# Altium PCB PCB2.PcbDoc (part 1 of 2)
Units mil, origin at the board's own origin, x right, y up, seen from the top; angles counter-clockwise.
Board outline 3629.25 x 3621.67 mil, 2 copper layers (Top Layer, Bottom Layer); 84 components, 57 nets, 320 pads, 58 vias.
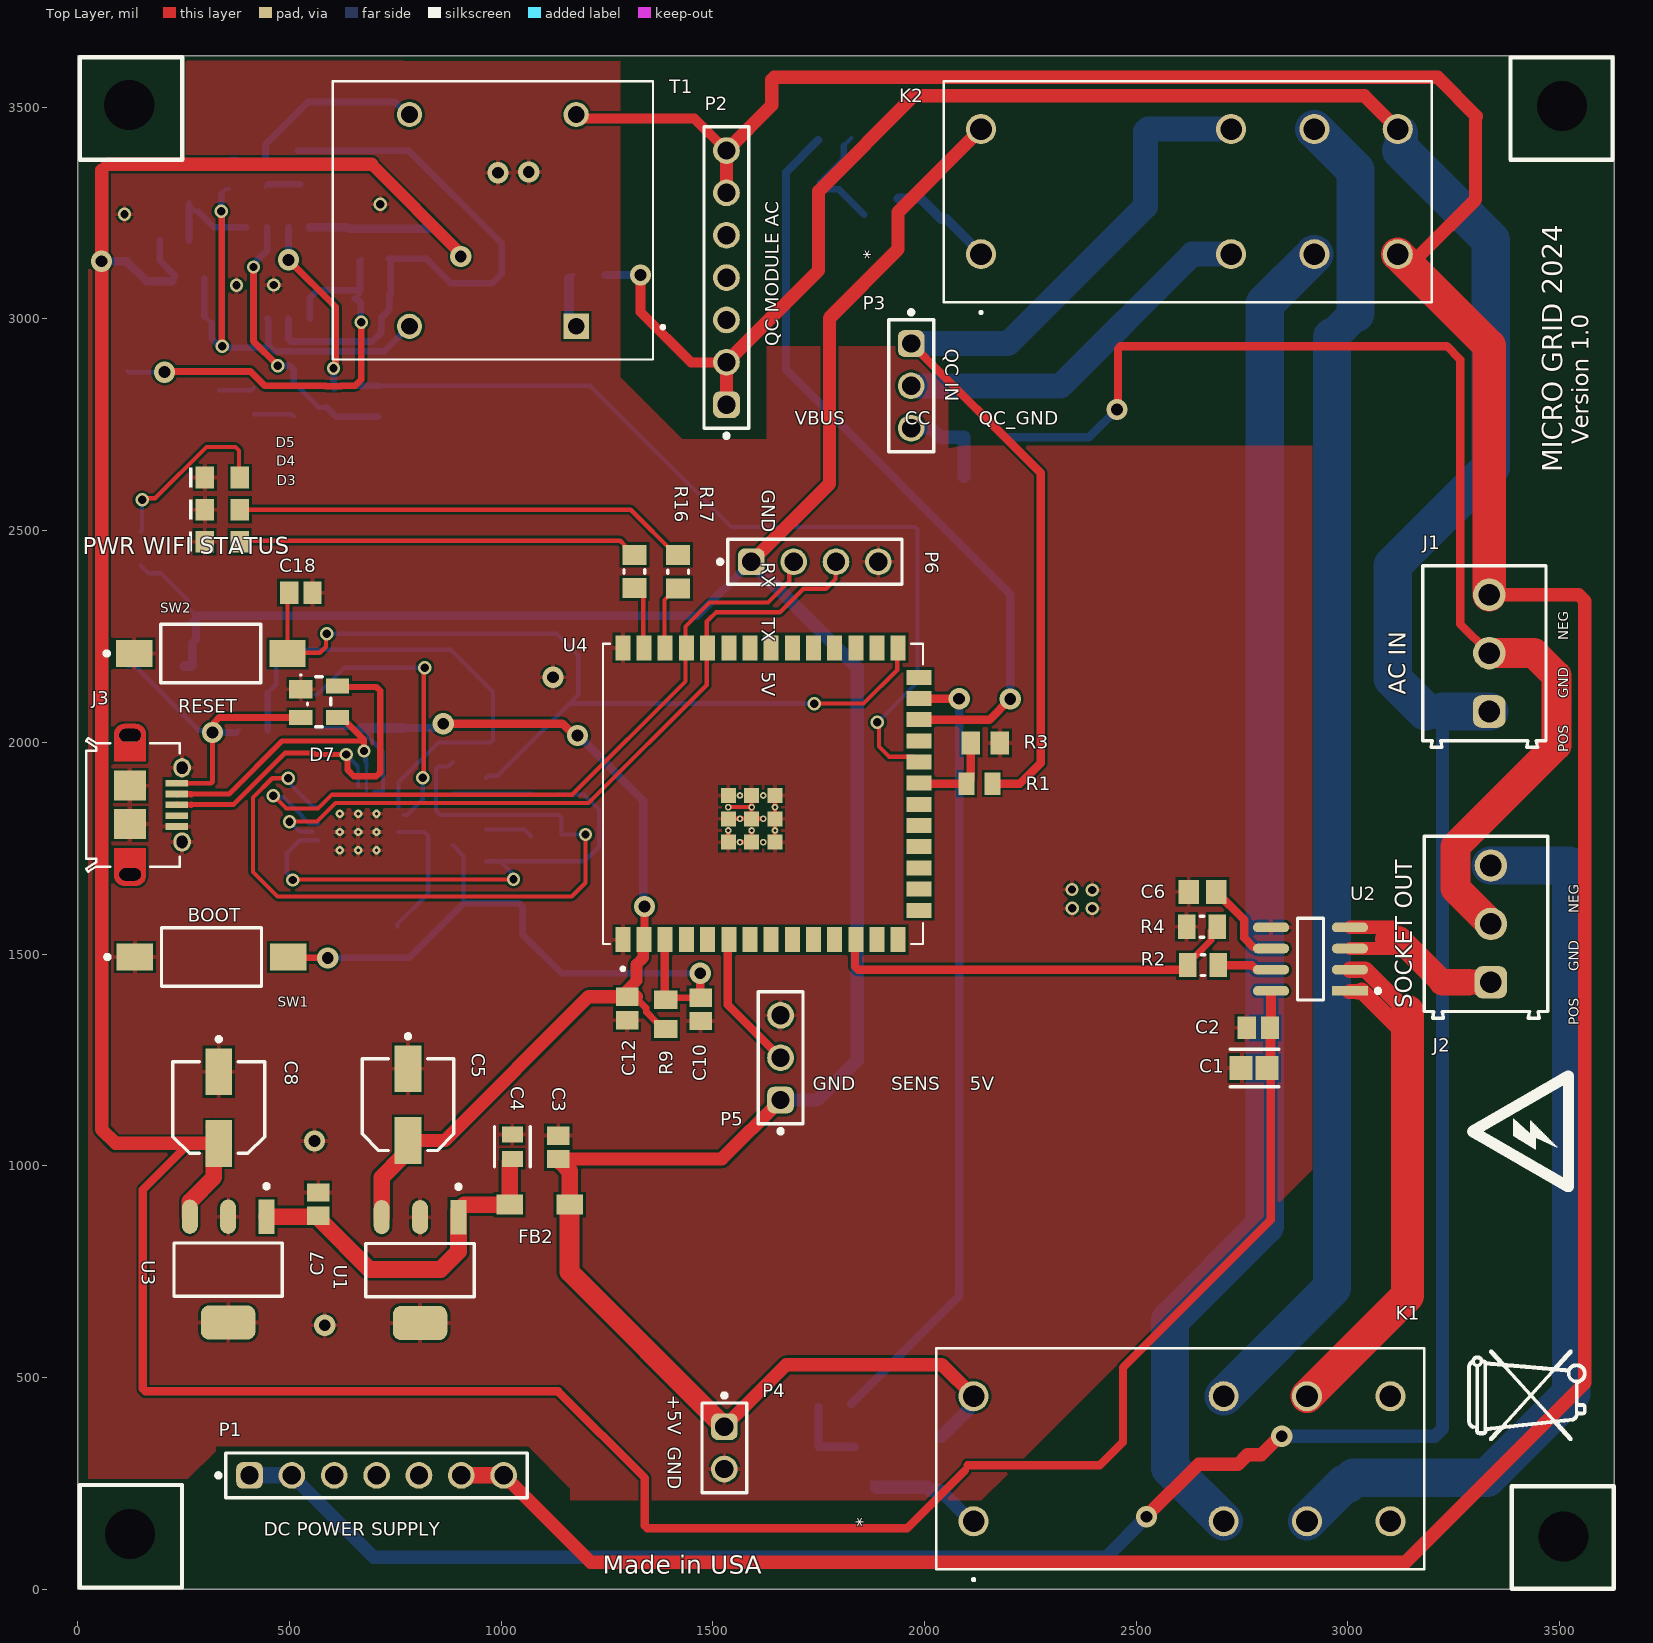
[diagram p0: Top Layer view]
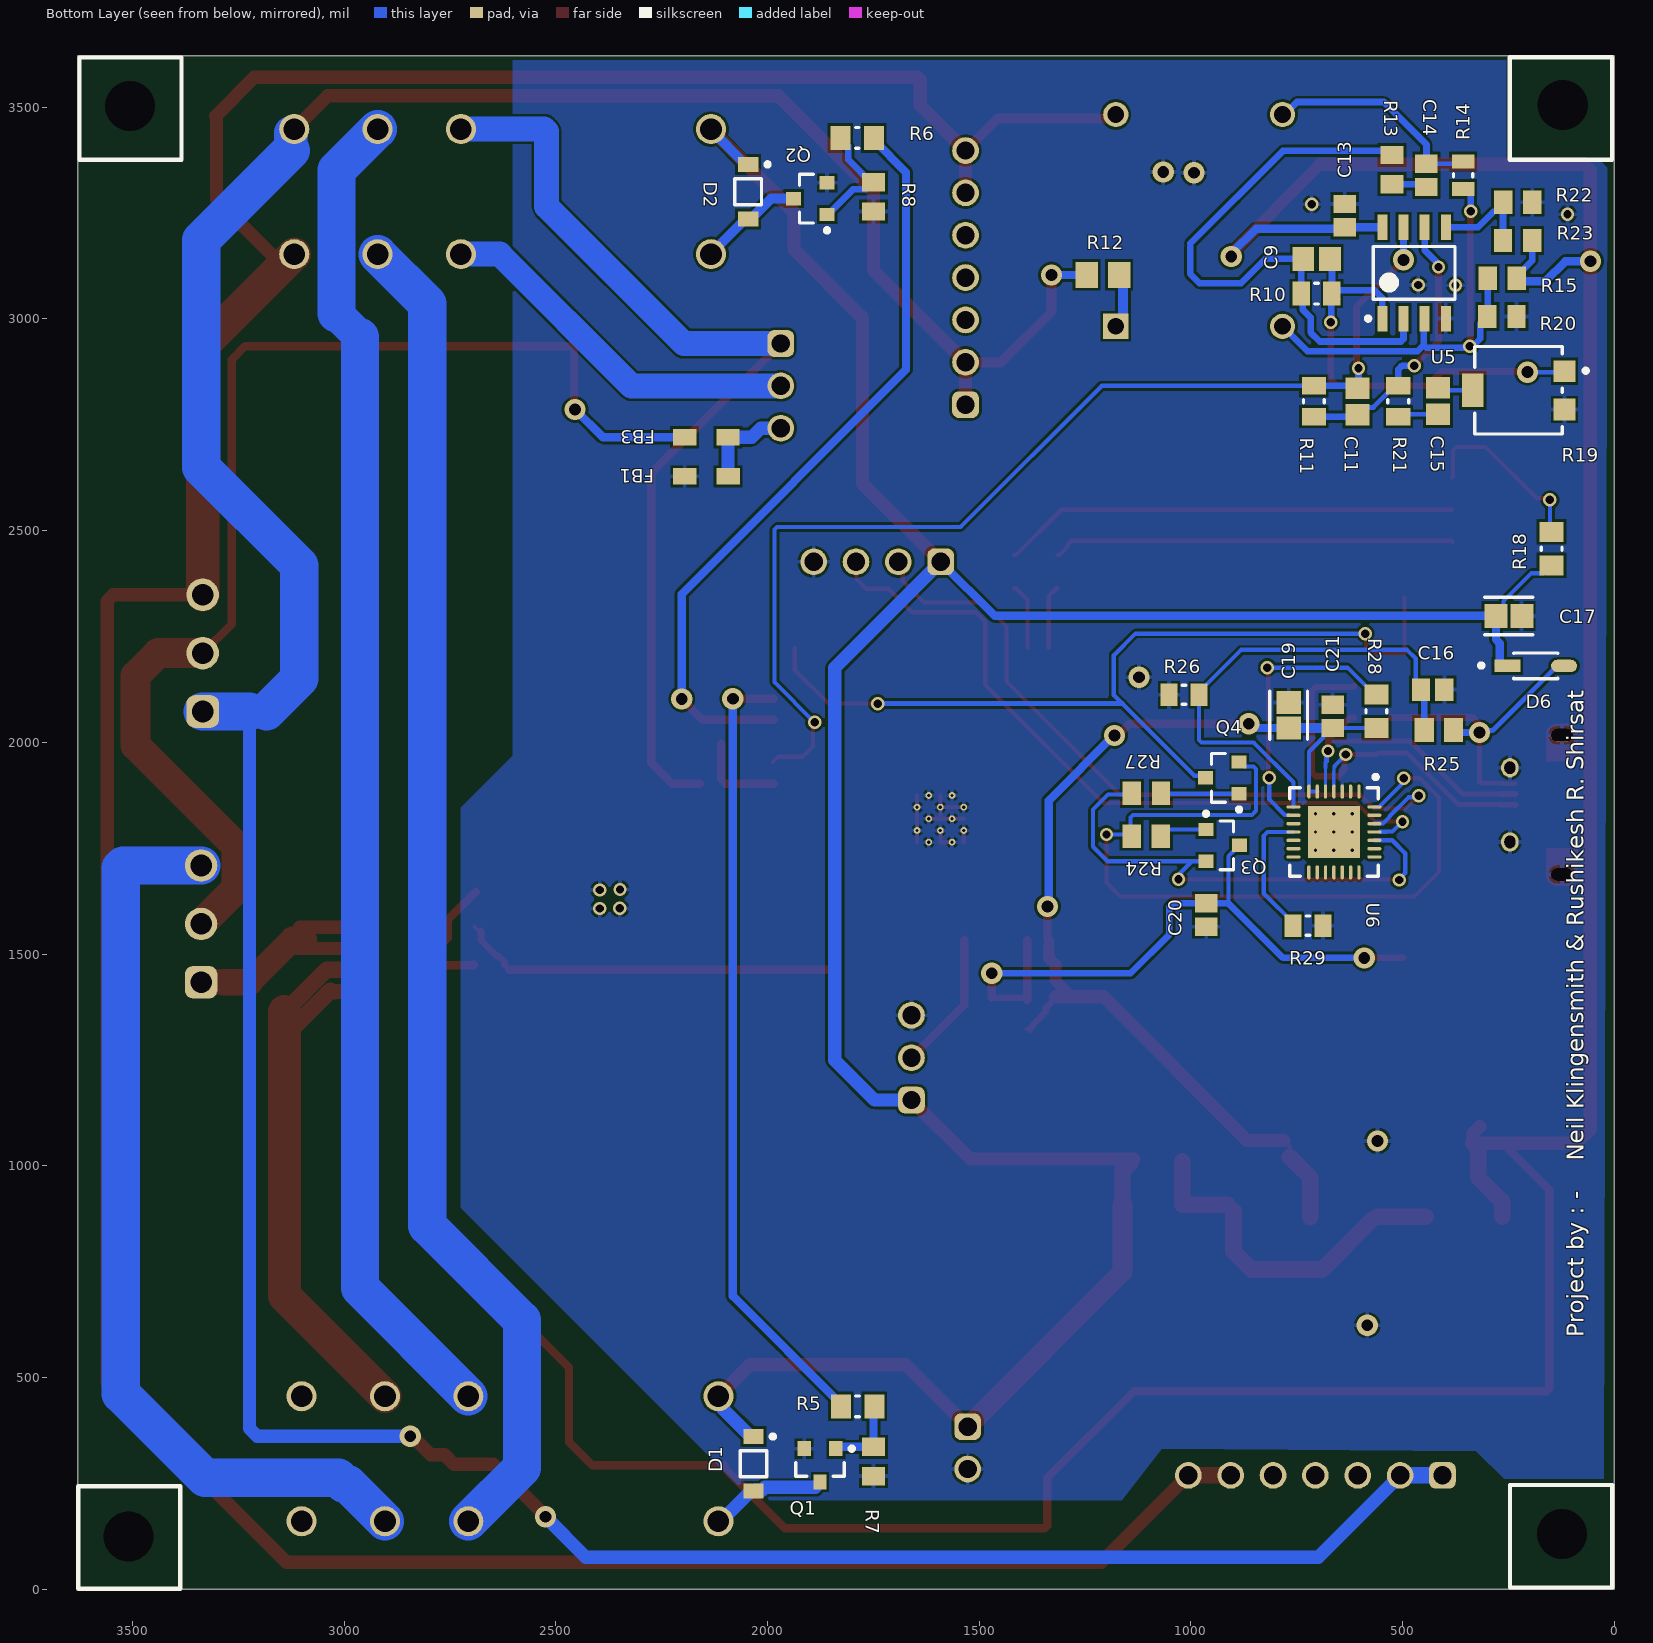
[diagram p1: Bottom Layer view, seen from below]
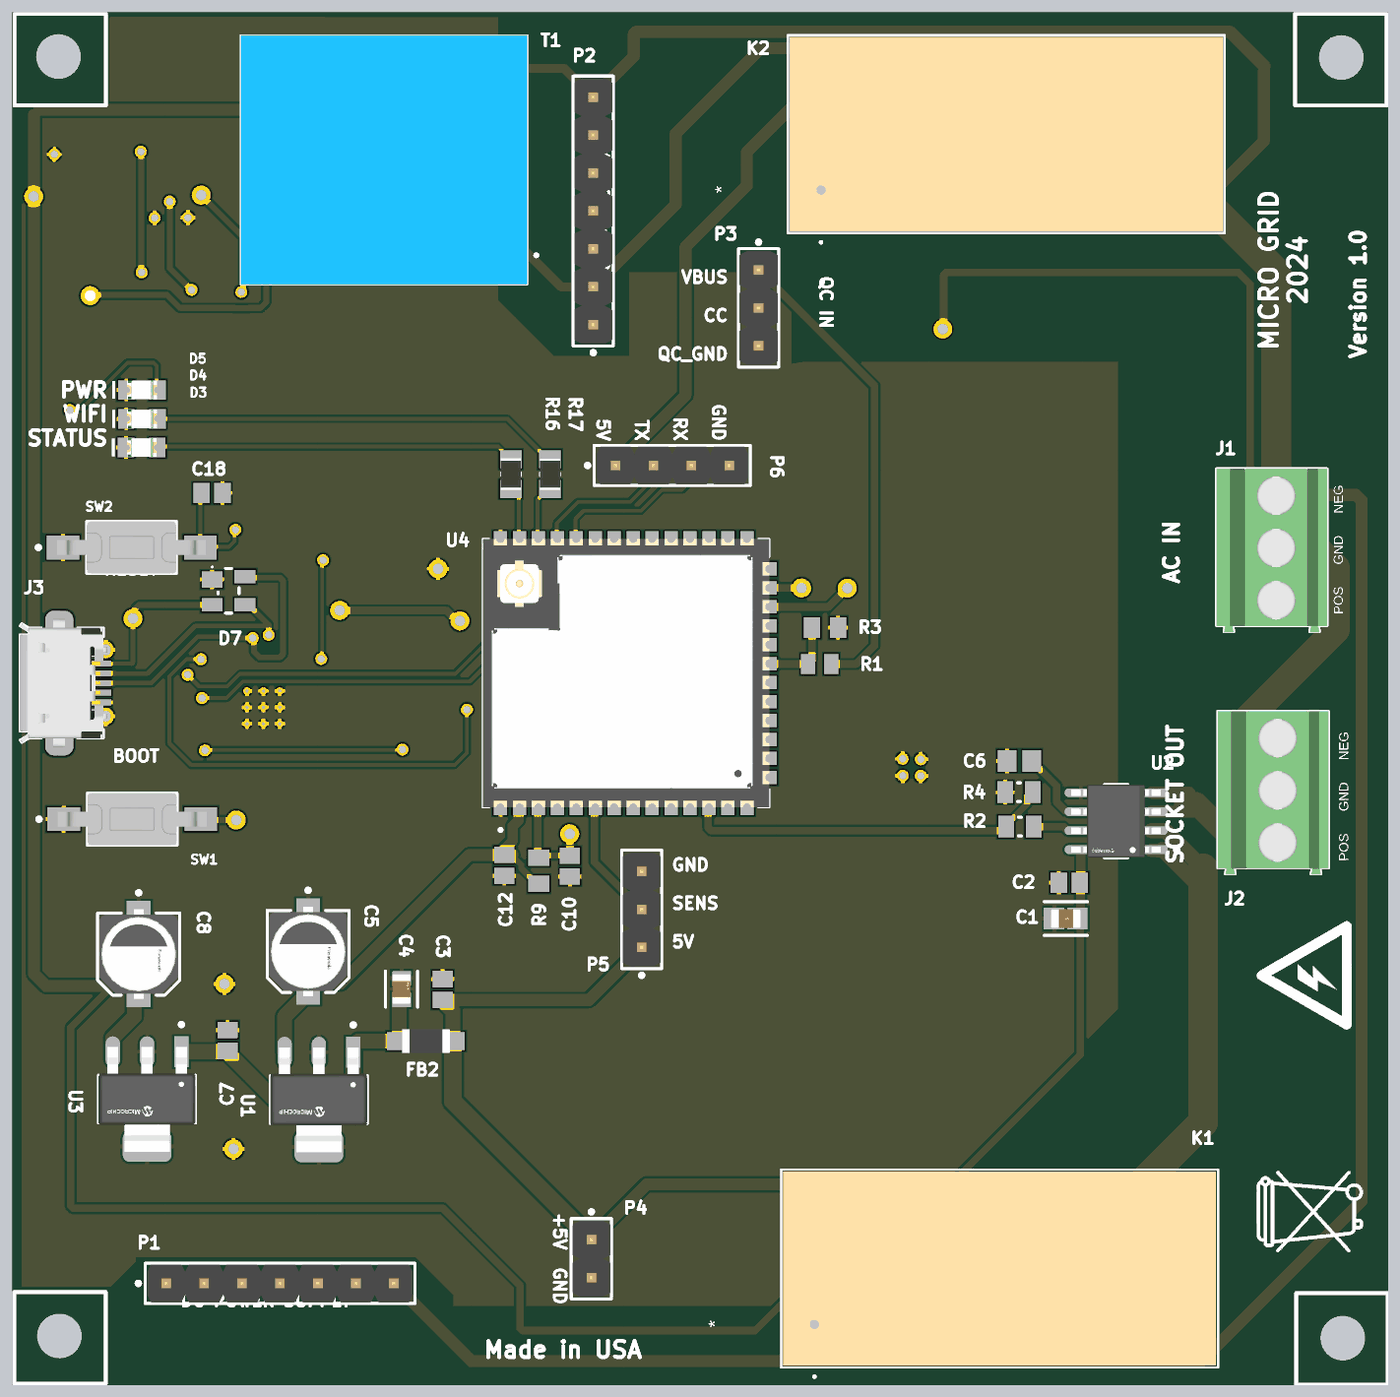
[diagram p3: 3D render of the assembled board from above, using the file's embedded part models]

## Layer stack, top to bottom
Top Solder: solder mask 0.4, Solder Resist, Dk 3.5
Top Layer: signal copper 1.4
Dielectric 1: dielectric 12.6, FR-4, Dk 4.8
Bottom Layer: signal copper 1.4
Bottom Solder: solder mask 0.4, Solder Resist, Dk 3.5

## Board outline
0,0 3629.25,0 3629.25,3621.67 0,3621.67

## Design rules (kind name [scope] priority, off if disabled: settings)
Clearance [All] p1: gap=6 ignorepadtopadclearanceinfootprint=FALSE
DiffPairsRouting [All] p1: maxlimit=10 minlimit=10 mostfreqgap=10 toplayer_minwidth=15 toplayer_maxwidth=15 toplayer_prefwidth=15 bottomlayer_minwidth=15 bottomlayer_maxwidth=15 bottomlayer_prefwidth=15 maxuncoupledlength=500
Height [All] p1 off: minheight=0 maxheight=1000 prefheight=500
HoleSize [All] p1: absolutevalues=TRUE maxlimit=200 minlimit=1 maxpercent=80.000 minpercent=20.000
MinimumSolderMaskSliver [All] p1 off: minsoldermaskwidth=10
PolygonConnect [All] p1: connectstyle=Relief reliefconductorwidth=10 reliefentries=4 polygonreliefangle="90 Angle" airgapwidth=6
RoutingVias [All] p1: holewidth=28 width=50 viastyle="Through Hole" minholewidth=28 minwidth=50 maxholewidth=28 maxwidth=50
SilkToSolderMaskClearance [IsPad] p1 off: minsilkscreentomaskgap=10 clearancetoexposedcopper=TRUE
SolderMaskExpansion [All] p1: expansion=4 istentingtop=FALSE
SupplyNets "Schematic Supply Nets_6" [InNet('GND')] p1: voltage=0.000
SupplyNets "Schematic Supply Nets_5" [InNet('+3V3B')] p2: voltage=0.000
SupplyNets "Schematic Supply Nets_4" [InNet('+5V')] p3: voltage=0.000
SupplyNets "Schematic Supply Nets_3" [InNet('+5V_B')] p4: voltage=0.000
SupplyNets "Schematic Supply Nets_1" [InNet('+3V3A')] p5: voltage=0.000
SupplyNets "Schematic Supply Nets" [InNet('VBUS')] p6: voltage=0.000
Width [All] p1: maxlimit=100 minlimit=6 preferedwidth=10 minimp=50.000000 maximp=50.000000 favimp=50.000000
25 further rules are at their usual default settings.

## Classes and differential pairs
differential pair USB_D: +USB_D_P -USB_D_N

## Components (designator, comment, footprint, x,y, rotation, side; value= is the part's Value field where it differs from the comment)
C1 "10μF 25V" FP-C2012-125-0_2-IPC_B#1 2779,1230.94 r180 top
C2 "0.1uf 50v" CAPC2013X140X50LL20T25 2788.11,1325.72 r0 top
C3 "0.1uf 50v" CAPC2013X140X50LL20T25 1135.25,1043.68 r270 top
C4 "10uf 16v" FP-GRM21B-0_1-IPC_C 1026.77,1045.13 r90 top
C5 "100uf 10v" FP-SC-MFG 780.45,1144.16 r270 top
C6 "1nf 25v 5%" CAPC2013X145X50NL20T20 2656.46,1646.78 r180 top
C7 "0.1uf 50v" CAPC2013X140X50LL20T25 568.17,909.22 r270 top
C8 "100uf 10v" FP-SC-MFG 333.5,1137.46 r270 top
C9 "100p" CAPC2013X140X50NL20T25 703.06,3141.55 r180 bottom
C10 "1uf" CAPC2013X140X50LL20T25 1471.08,1369.37 r90 top
C11 "100p" CAPC2013X140X50NL20T25 606.98,2804.6 r90 bottom
C12 "0.1uf 50v" CAPC2013X140X50LL20T25 1297.75,1371.4 r90 top
C13 "0.1uf 50v" CAPC2013X140X50LL20T25 637.01,3243.62 r90 bottom
C14 "1uf" CAPC2013X140X50LL20T25 444.01,3338.68 r270 bottom
C15 "100p" CAPC2013X140X50NL20T25 416.47,2805.95 r270 bottom
C16 "1uf" CAPC2013X140X50LL20T25 429.18,2124.59 r180 bottom
C17 "10μF 25V" FP-C2012-125-0_2-IPC_B#2 249.84,2298.43 r180 bottom
C18 "0.1uf 50v" CAPC2013X140X50LL20T25 527.17,2353.4 r0 top
C19 "10μF 25V" FP-C2012-125-0_2-IPC_B#3 769.44,2063.93 r90 bottom
C20 "0.1uf 50v" CAPC2013X140X50LL20T25 964.24,1592.07 r270 bottom
C21 "0.1uf 50v" CAPC2013X140X50LL20T25 665.58,2061.16 r270 bottom
D1 "SMMSD914T1G" ONSC-SOD-123-2-425-04_V 2033.18,296.18 r270 bottom
D2 "SMMSD914T1G" ONSC-SOD-123-2-425-04_V 2045.62,3300.2 r270 bottom
D3 "150080RS75000" WL-SMCW_0805_150080xx75000 341.51,2473.66 r0 top
D4 "150080BS75000" WL-SMCW_0805_150080xx75000 342.1,2549.16 r0 top
D5 "150080RS75000" WL-SMCW_0805_150080xx75000 342.1,2625.25 r0 top
D6 "1N5819HW-7-F" FP-SOD123-IPC_A 186.07,2180.36 r180 bottom
D7 "SP0503BAHTG" LFUS-SOT143-4_V 570.56,2095.8 r0 top
FB1 "742792022" WE-CBF_0805_L2W1.2H0.9_HC 2144.25,2627.88 r180 bottom
FB2 "74279218" WE-CBF_1206_L3.2W1.6H1.1_HC 1091.18,908.06 r180 top
FB3 "742792022" WE-CBF_0805_L2W1.2H0.9_HC 2144.31,2720.46 r180 bottom
J1 "AC IN" 691214110003 3321.92,2210.5 r90 top
J2 "OUTPUT TO SOCKET" 691214110003 3325.65,1571.18 r90 top
J3 "629105150921" 629105150921 124.11,1852.28 r270 top
K1 "AZ733-2CE-12DE" AZ733-2C_AMZ 2115.86,160.55 r90 top
K2 "AZ733-2CE-12DE" AZ733-2C_AMZ 2133.3,3152.56 r90 top
P1 "DC POWER SUPLY AC IN" 61300711121 706.2,268.87 r0 top
P2 "QC AC INPUT" 61300711121 1532.37,3097.3 r90 top
P3 "QC INPUT" 61300311121 1968.49,2841.67 r270 top
P4 "5V DC IN" 61300211121 1527.43,333.9 r270 top
P5 "HALL SENSOR A3144" 61300311121 1660.14,1255.13 r90 top
P6 "UART" 61300411121 1741.01,2426.17 r0 top
Q1 "MMBT2222ALT1G" ONSC-SOT-23-3-318-08_V 1875.92,292.6 r270 bottom
Q2 "MMBT2222ALT1G" ONSC-SOT-23-3-318-08_V 1898.69,3283.64 r0 bottom
Q3 "MMBT2222ALT1G" ONSC-SOT-23-3-318-08_V 925.14,1756.54 r180 bottom
Q4 "MMBT2222ALT1G" ONSC-SOT-23-3-318-08_V 925.79,1915.98 r0 bottom
R1 "147k 1%" RESC2013X70X40LL20T20 2129.69,1902.37 r180 top
R2 "10k 1%" RESC2013X50X30NL20T20 2657.47,1473.74 r180 top
R3 "10k 1%" RESC2013X60X40NL15T20 2143.57,1998.28 r0 top
R4 "10k 1%" RESC2013X50X30NL20T20 2655.18,1564.26 r0 top
R5 "1k 1%" RESC2013X60X35ML10T20 1787.27,431.94 r180 bottom
R6 "1k 1%" RESC2013X60X35ML10T20 1788.38,3426.97 r0 bottom
R7 "10k 1%" RESC2013X60X40NL15T20 1749.63,301.7 r90 bottom
R8 "10k 1%" RESC2013X60X40NL15T20 1749.87,3287.74 r90 bottom
R9 "10k 1%" RESC2013X60X40NL15T20 1388.68,1357.42 r90 top
R10 "100k 1%" RESC2013X60X30NL20T20 703.44,3059.38 r180 bottom
R11 "100k 1%" RESC2013X60X30NL20T20 709.83,2805.3 r90 bottom
R12 "820k 1%" RESC2013X70X40ML20T20 1208.31,3103.66 r180 bottom
R13 "10k 1%" RESC2013X60X40NL15T20 525.17,3352.45 r90 bottom
R14 "100r 1%" RESC2013X50X30LL20T20 357.5,3339.05 r90 bottom
R15 "10k 1%" RESC2013X60X40NL15T20 264.98,3095.35 r180 bottom
R16 "1k 1%" RESC2013X60X35ML10T20 1315.01,2403.13 r90 top
R17 "1k 1%" RESC2013X60X35ML10T20 1418.07,2403.07 r90 top
R18 "1k 1%" RESC2013X60X35ML10T20 148.5,2457.34 r90 bottom
R19 "100k" FP-TS53YL-MFG 226.39,2831.15 r90 bottom
R20 "10k 1%" RESC2013X60X40NL15T20 265.8,3005.49 r180 bottom
R21 "100k 1%" RESC2013X60X30NL20T20 510.61,2805.48 r90 bottom
R22 "10k 1%" RESC2013X60X40NL15T20 228.49,3275.22 r180 bottom
R23 "10k 1%" RESC2013X60X40NL15T20 228.69,3184.9 r180 bottom
R24 "10k 1%" RESC2013X60X40NL15T20 1105.52,1778.28 r0 bottom
R25 "22.1K 1%" RESC2013X70X40NL20T20 414.93,2029.07 r180 bottom
R26 "47K 1%" RESC2013X60X35NL10T20 1016.31,2112.14 r0 bottom
R27 "10k 1%" RESC2013X60X40NL15T20 1105.33,1879.34 r0 bottom
R28 "1k 1%" RESC2013X60X35ML10T20 562.02,2073.5 r270 bottom
R29 "10k 1%" RESC2013X60X35NL10T20 723.62,1567.08 r0 bottom
SW1 "RESET" TECO-FSMSM-2_V 316.36,1493.11 r0 top
SW2 "BOOT" TECO-FSMSM-2_V 314.81,2209.74 r0 top
T1 "ZMPT101B" XFMR_ZMPT101B 980.65,3232.28 r180 top
U1 "MIC5209-3.3YS" FP-SOT223-3LD-PL-1-IPC_A 808.87,753.66 r270 top
U2 "ACS725LLCTR-20AB-T" FP-LCN-8-IPC_B 2911.48,1487.96 r180 top
U3 "MIC5209-3.3YS" FP-SOT223-3LD-PL-1-IPC_A 355.72,754.76 r270 top
U4 "ESP32-S3-WROOM-1U-N16R8" XCVR_ESP32-S3-WROOM-1U-N16R8 1618.88,1878.37 r90 top
U5 "LM358ADR2G" ONSC-SOIC-8-751-07_V 473.22,3108.35 r90 bottom
U6 "CP2102-GM" SLAB-QFN-28-3125x3125TP_N 662.5,1788.21 r270 bottom

## Footprints (in the part's own frame and the unit in brackets; to place one, negate y for a bottom-side part, rotate by r counter-clockwise, add the part's x,y. Pads: shape width x height; smd on the part's side, far side on the other; paste and mask are expansions set on the pad)
61300211121 [mm] "Pin Header, pitch 2.54 mm, THT, Vertical, single row, 2p"
  rrect50% 1.6x1.6 hole 1.1: 1(-1.27,0)
  round 1.6 hole 1.1: 2(1.27,0)
  silkscreen extent -3.26,-1.34 2.69,1.34, body extent -2.54,-1.27 2.54,1.27, height 8.57
61300311121 [mm] "Pin Header, pitch 2.54 mm, THT, Vertical, single row, 3p"
  rrect50% 1.6x1.6 hole 1.1: 1(-2.54,0)
  round 1.6 hole 1.1: 2(0,0) 3(2.54,0)
  silkscreen extent -4.53,-1.34 3.96,1.35, body extent -3.81,-1.27 3.81,1.27, height 8.57
61300411121 [mm] "Pin Header, pitch 2.54 mm, THT, Vertical, single row, 4p"
  rrect50% 1.6x1.6 hole 1.1: 1(-3.81,0)
  round 1.6 hole 1.1: 2(-1.27,0) 3(1.27,0) 4(3.81,0)
  silkscreen extent -5.8,-1.35 5.23,1.34, body extent -5.08,-1.27 5.08,1.27, height 8.57
61300711121 [mm] "Pin Header, pitch 2.54 mm, THT, Vertical, single row, 7p"
  rrect50% 1.6x1.6 hole 1.1: 1(-7.62,0)
  round 1.6 hole 1.1: 2(-5.08,0) 3(-2.54,0) 4(0,0) 5(2.54,0) 6(5.08,0) 7(7.62,0)
  silkscreen extent -9.61,-1.34 9.04,1.34, body extent -8.89,-1.27 8.89,1.27, height 8.57
629105150921 [mm] "Micro USB 2.0 Type AB, Receptacle, Horizontal, SMT"
  rect 0.4x1.35 smd: 1(-1.3,2.8) 2(-0.65,2.8) 3(0,2.8) 4(0.65,2.8) 5(1.3,2.8)
  oval 0.75x1.3 hole 0.75 slot 1.3 at 90 deg: Shell(-4.175,0) Shell(4.175,0)
  oval 1.15x1.05 hole 0.65 slot 0.75 at 0 deg: Shell(-2.225,3.12) Shell(2.225,3.12)
  rect 1.8x1.9 smd: Shell(-1.15,0) Shell(1.15,0)
  Top Layer region: -4.25,-0.95 -4.48,-0.904 -4.674,-0.774 -4.804,-0.58 -4.85,-0.35 -4.85,-0.35 -4.85,0.35 -4.804,0.58 -4.674,0.774 -4.48,0.904 -4.25,0.95 -4.25,0.95 -2.6,0.95 -2.6,-0.95
  Top Layer pour cut-out: -4.25,-0.65 -4.365,-0.627 -4.462,-0.562 -4.527,-0.465 -4.55,-0.35 -4.55,-0.35 -4.55,0.35 -4.527,0.465 -4.462,0.562 -4.365,0.627 -4.25,0.65 -4.25,0.65 -4.1,0.65 -3.985,0.627 -3.888,0.562 -3.823,0.465 -3.8,0.35 -3.8,0.35 -3.8,-0.35 -3.823,-0.465 -3.888,-0.562 -3.985,-0.627 -4.1,-0.65 -4.1,-0.65
  Top Layer region: 4.25,-0.95 4.48,-0.904 4.674,-0.774 4.804,-0.58 4.85,-0.35 4.85,-0.35 4.85,0.35 4.804,0.58 4.674,0.774 4.48,0.904 4.25,0.95 4.25,0.95 2.6,0.95 2.6,-0.95
  silkscreen extent -4,-2.64 4,2.97, body extent -4.3,-2.64 4.3,3.23, height 2.76
691214110003 [mm] "3.50 mm Horizontal Entry Modular, 3p"
  rrect50% 1.95x1.95 hole 1.3: 1(-3.5,-0.3)
  round 1.95 hole 1.3: 2(0,-0.3) 3(3.5,-0.3)
  silkscreen extent -5.65,-3.7 5.25,3.7, body extent -5.7,-3.7 5.25,3.7, height 8.55
AZ733-2C_AMZ [mil]
  round 71 / inner round 60 / far side round 71 hole 51 paste-99999 mask+0: 1(0,0) 2(0,-590.55) 3(0,-787.4) 4(0,-984.25) 5(295.27,-984.25) 6(295.27,-787.4) 7(295.27,-590.55) 8(295.27,0)
  silkscreen extent -141,-1064 409,88, body extent -108,-1059 404,83, height 1035
CAPC2013X140X50LL20T25 [mm] "Chip Capacitor, 2-Leads, Body 2.00x1.25mm, IPC High Density"
  rect 1.1x1.35 smd: 1(-0.7,0) 2(0.7,0)
  body extent -1.1,-0.72 1.1,0.72, height 1.4
CAPC2013X140X50NL20T25 [mm] "Chip Capacitor, 2-Leads, Body 2.00x1.25mm, IPC Medium Density"
  rect 1.3x1.45 smd: 1(-0.8,0) 2(0.8,0)
  body extent -1.1,-0.72 1.1,0.72, height 1.4
CAPC2013X145X50NL20T20 [mm] "Chip Capacitor, 2-Leads, Body 2.00x1.25mm, IPC Medium Density"
  rect 1.25x1.45 smd: 1(-0.825,0) 2(0.825,0)
  body extent -1.1,-0.72 1.1,0.72, height 1.45
FP-C2012-125-0_2-IPC_B#1 [mil]
  rect 54.25x57.33 smd paste+0 mask+0: 1(-30.08,0) 2(32,0)
  silkscreen extent -57,-44 57,44, body extent -39,-25 39,25, height 57
FP-C2012-125-0_2-IPC_B#2 [mil]
  rect 54.25x57.33 smd paste+0 mask+0: 1(-30.08,0) 2(31.84,0)
  silkscreen extent -57,-44 57,44, body extent -39,-25 39,25, height 57
FP-C2012-125-0_2-IPC_B#3 [mil]
  rect 54.25x57.33 smd paste+0 mask+0: 1(-30.08,0) 2(30.08,0)
  silkscreen extent -57,-44 57,44, body extent -39,-25 39,25, height 57
FP-GRM21B-0_1-IPC_C [mil]
  rect 37.71x49.69 smd paste+0 mask+0: 1(-28.63,0) 2(28.63,0)
  silkscreen extent -47,-42 47,42, body extent -51,-31 51,31, height 10
FP-LCN-8-IPC_B [mil]
  rect 85.59x22.92 smd paste+0 mask+0: 1(-93.15,75)
  rrect100% 85.59x22.92 smd paste+0 mask+0: 2(-93.15,25) 3(-93.15,-25) 4(-93.15,-75) 5(93.15,-75) 6(93.15,-25) 7(93.15,25) 8(93.15,75)
  silkscreen extent -164,-96 31,96, body extent -118,-96 118,96, height 69
FP-SC-MFG [mm]
  rect 2.8x1.6 smd paste+0 mask+0: 1(-2.15,0) 2(2.15,0)
  silkscreen extent -4.22,-2.75 2.75,2.75, body extent -3.8,-3 3.8,3, height 0.25
FP-SOD123-IPC_A [mil]
  rect 61.32x29.23 smd paste+0 mask+0: 1(-66.94,0)
  rrect100% 61.32x29.23 smd paste+0 mask+0: 2(66.94,0)
  silkscreen extent -134,-31 52,31, body extent -72,-31 72,31, height 57
FP-SOT223-3LD-PL-1-IPC_A [mm]
  rect 2.054x0.962 smd paste+0 mask+0: 1(-3.175,2.3)
  rrect100% 2.054x0.962 smd paste+0 mask+0: 2(-3.175,0) 3(-3.175,-2.3)
  rrect47% 2.054x3.262 smd paste+0 mask+0: 4(3.175,0)
  silkscreen extent -5.12,-3.25 1.6,3.25, body extent -4.7,-3.75 4.7,3.75, height 0.25
FP-TS53YL-MFG [mm]
  rect 1.3x1.3 smd paste+0 mask+0: 1(1.15,-2.75) 3(-1.15,-2.75)
  rect 2x1.3 smd paste+0 mask+0: 2(0,2.75)
  silkscreen extent -2.62,-4.15 2.62,2.63, body extent -2.5,-3.25 2.5,3.25, height 2.6
LFUS-SOT143-4_V [mm] "SOT143, 4-Leads, Body 3.04x1.4mm, Pitch 1.90mm"
  rect 1.4x1.1 smd: 1(-1.1,0.75)
  rect 1.4x0.9 smd: 2(-1.1,-0.95) 3(1.1,-0.95) 4(1.1,0.95)
  silkscreen extent -1.15,-1.5 0.7,1.65, body extent -0.7,-1.52 0.7,1.52, height 1.22
ONSC-SOD-123-2-425-04_V [mm] "SOD, 2-Leads, Body 2.69x1.6mm"
  rect 0.91x1.22 smd: 1(-1.635,0) 2(1.635,0)
  silkscreen extent -1.76,-0.8 0.78,1.28, body extent -1.35,-0.8 1.35,0.8, height 1.35
ONSC-SOIC-8-751-07_V [mm] "SOIC, 8-Leads, Body 4.9x3.9mm, Pitch 1.27mm"
  rect 1.52x0.6 smd: 1(-2.74,1.905) 2(-2.74,0.635) 3(-2.74,-0.635) 4(-2.74,-1.905) 5(2.74,-1.905) 6(2.74,-0.635) 7(2.74,0.635) 8(2.74,1.905)
  silkscreen extent -2.86,-2.45 1.58,2.88, body extent -1.95,-2.45 1.95,2.45, height 1.75
ONSC-SOT-23-3-318-08_V [mm] "SOT23, 3-Leads, Body 2.92x1.3mm, Pitch 0.95mm"
  rect 0.9x0.8 smd: 1(-1,0.95) 2(-1,-0.95) 3(1,0)
  silkscreen extent -1.12,-1.46 0.65,2.02, body extent -0.65,-1.46 0.65,1.46, height 1.11
RESC2013X50X30LL20T20 [mm] "Chip Resistor, 2-Leads, Body 2.00x1.25mm, IPC High Density"
  rect 0.85x1.35 smd: 1(-0.825,0) 2(0.825,0)
  silkscreen extent -0.1,-0.58 0.1,0.58, body extent -1.1,-0.72 1.1,0.72, height 0.5
RESC2013X50X30NL20T20 [mm] "Chip Resistor, 2-Leads, Body 2.00x1.25mm, IPC Medium Density"
  rect 1.05x1.45 smd: 1(-0.925,0) 2(0.925,0)
  silkscreen extent -0.1,-0.62 0.1,0.63, body extent -1.1,-0.72 1.1,0.72, height 0.5
RESC2013X60X30NL20T20 [mm] "Chip Resistor, 2-Leads, Body 2.00x1.25mm, IPC Medium Density"
  rect 1.05x1.45 smd: 1(-0.925,0) 2(0.925,0)
  silkscreen extent -0.1,-0.63 0.1,0.63, body extent -1.1,-0.72 1.1,0.72, height 0.6
RESC2013X60X35ML10T20 [mm] "Chip Resistor, 2-Leads, Body 2.1x1.35mm, IPC Low Density"
  rect 1.2x1.45 smd: 1(-1,0) 2(1,0)
  silkscreen extent -0.1,-0.62 0.1,0.63, body extent -1.05,-0.68 1.05,0.67, height 0.6
RESC2013X60X35NL10T20 [mm] "Chip Resistor, 2-Leads, Body 2.1x1.35mm, IPC Medium Density"
  rect 1x1.35 smd: 1(-0.9,0) 2(0.9,0)
  silkscreen extent -0.1,-0.57 0.1,0.58, body extent -1.05,-0.68 1.05,0.67, height 0.6
RESC2013X60X40NL15T20 [mm] "Chip Resistor, 2-Leads, Body 2.00x1.25mm, IPC Medium Density"
  rect 1.1x1.4 smd: 1(-0.875,0) 2(0.875,0)
  body extent -1.07,-0.7 1.08,0.7, height 0.6
RESC2013X70X40LL20T20 [mm] "Chip Resistor, 2-Leads, Body 2.00x1.25mm, IPC High Density"
  rect 0.95x1.35 smd: 1(-0.775,0) 2(0.775,0)
  body extent -1.1,-0.72 1.1,0.72, height 0.7
RESC2013X70X40ML20T20 [mm] "Chip Resistor, 2-Leads, Body 2.00x1.25mm, IPC Low Density"
  rect 1.35x1.55 smd: 1(-0.975,0) 2(0.975,0)
  body extent -1.1,-0.72 1.1,0.72, height 0.7
RESC2013X70X40NL20T20 [mm] "Chip Resistor, 2-Leads, Body 2.00x1.25mm, IPC Medium Density"
  rect 1.15x1.45 smd: 1(-0.875,0) 2(0.875,0)
  body extent -1.1,-0.72 1.1,0.72, height 0.7
SLAB-QFN-28-3125x3125TP_N [mm] "QFN, 28-Leads, Body 5x5mm, Pitch 0.5mm, Thermal Pad 3.13x3.13mm, IPC Medium Density"
  oval 0.85x0.2 smd: 1(-2.425,1.5) 2(-2.425,1) 3(-2.425,0.5) 4(-2.425,0) 5(-2.425,-0.5) 6(-2.425,-1) 7(-2.425,-1.5) 15(2.425,-1.5) 16(2.425,-1) 17(2.425,-0.5) 18(2.425,0) 19(2.425,0.5) 20(2.425,1) 21(2.425,1.5)
  oval 0.2x0.85 smd: 8(-1.5,-2.425) 9(-1,-2.425) 10(-0.5,-2.425) 11(0,-2.425) 12(0.5,-2.425) 13(1,-2.425) 14(1.5,-2.425) 22(1.5,2.425) 23(1,2.425) 24(0.5,2.425) 25(0,2.425) 26(-0.5,2.425) 27(-1,2.425) 28(-1.5,2.425)
  rect 3.13x3.13 smd: 29(0,0)
  silkscreen extent -3.42,-2.65 2.65,2.65, body extent -2.5,-2.5 2.5,2.5, height 1
TECO-FSMSM-2_V [mm] "SMD, 2-Leads, Body 6x3.5mm, Pitch 9.19mm"
  rect 2.2x1.6 smd: 1(-4.595,0)
  rect 2.18x1.6 smd: 2(4.595,0)
  silkscreen extent -6.37,-1.75 3,1.75, body extent -4.98,-1.75 4.98,1.75, height 4.4
WE-CBF_0805_L2W1.2H0.9_HC [mm] "SMD EMI Suppression Ferrite  Bead, body 2.00x1.20mm"
  rect 1.4x1 smd: 1(-1.3,0) 2(1.3,0)
  body extent -1,-0.6 1,0.6, height 0.9
WE-CBF_1206_L3.2W1.6H1.1_HC [mm] "SMD EMI Suppression Ferrite  Bead, body 3.20x1.60mm"
  rect 1.6x1.2 smd: 1(-1.8,0) 2(1.8,0)
  body extent -1.6,-0.8 1.6,0.8, height 1.1
WL-SMCW_0805_150080xx75000 [mm] "SMD Mono-color Chip LED, body 2.0x1.25mm"
  rect 1.1x1.3 smd: 1(-1.05,0) 2(1.05,0)
  silkscreen extent -2,-0.6 -1.8,0.6, body extent -1,-0.63 1,0.62, height 0.7
XCVR_ESP32-S3-WROOM-1U-N16R8 [mm]
  rect 1.5x0.9 smd: 1(-8.75,8.41) 2(-8.75,7.14) 3(-8.75,5.87) 4(-8.75,4.6) 5(-8.75,3.33) 6(-8.75,2.06) 7(-8.75,0.79) 8(-8.75,-0.48) 9(-8.75,-1.75) 10(-8.75,-3.02) 11(-8.75,-4.29) 12(-8.75,-5.56) 13(-8.75,-6.83) 14(-8.75,-8.1) 27(8.75,-8.1) 28(8.75,-6.83) 29(8.75,-5.56) 30(8.75,-4.29) 31(8.75,-3.02) 32(8.75,-1.75) 33(8.75,-0.48) 34(8.75,0.79) 35(8.75,2.06) 36(8.75,3.33) 37(8.75,4.6) 38(8.75,5.87) 39(8.75,7.14) 40(8.75,8.41)
  rect 0.9x1.5 smd: 15(-6.985,-9.35) 16(-5.715,-9.35) 17(-4.445,-9.35) 18(-3.175,-9.35) 19(-1.905,-9.35) 20(-0.635,-9.35) 21(0.635,-9.35) 22(1.905,-9.35) 23(3.175,-9.35) 24(4.445,-9.35) 25(5.715,-9.35) 26(6.985,-9.35)
  rect 0.9x0.9 smd: 41_1(-2.9,2.09) 41_2(-1.5,2.09) 41_3(-0.1,2.09) 41_4(-2.9,0.69) 41_5(-1.5,0.69) 41_6(-0.1,0.69) 41_7(-2.9,-0.71) 41_8(-1.5,-0.71) 41_9(-0.1,-0.71)
  round 0.4 hole 0.2 mask+0: 41_10(-2.2,2.09) 41_11(-0.8,2.09) 41_12(-2.9,1.39) 41_13(-1.5,1.39) 41_14(-0.1,1.39) 41_15(-2.2,0.69) 41_16(-0.8,0.69) 41_17(-2.9,-0.01) 41_18(-1.5,-0.01) 41_19(-0.1,-0.01) 41_20(-2.2,-0.71) 41_21(-0.8,-0.71)
  silkscreen extent -10.6,-9.6 9,9.6, body extent -9,-9.6 9,9.6, height 3.35
XFMR_ZMPT101B [mm]
  rect 1.508x1.508 / inner round 1.508 / far side rect 1.508x1.508 hole 1: 1(-5,6.35)
  round 1.508 hole 1: 2(-5,-6.35) 3(5,-6.35) 4(5,6.35)
  silkscreen extent -10.3,-8.35 9.6,8.35, body extent -9.6,-8.35 9.6,8.35, height 18.8

## Part data
C1 C17 C19: library part CMP-08246-002675-1, "Multilayer Ceramic Capacitors 10μF ±10% 25V X5R SMD 0805", Capacitance=10uF, Case Code (Imperial)=0805, Case Code (Metric)=2012, Dielectric=X5R, Dielectric Material=Ceramic, Max Operating Temperature=85°C, Min Operating Temperature=-55°C, Package Quantity=1, Tolerance=10%, Voltage=25V, Case/Package=0805, Depth=1.25mm, Height=1.25mm, Lead Free="Lead Free", Length=2mm, Mount="Surface Mount", Packaging="Tape and Reel", REACH SVHC="No SVHC", Resistor Type=Ceramic, Series=C, Termination=SMD/SMT, Thickness=0.057inch, Voltage Rating=25V, Voltage Rating (DC)=25V, Weight=0.000194oz, Width=0.049inch
C2 C3 C7 C12 C13 C18 C20 C21: library part CMP-2007-04784-1, "08055F104KAT2A", Manufacturer="AVX Interconnect / Elco", Part Number=08055F104KAT2A
C4: library part CMP-2007-03453-2, "Chip Multilayer Ceramic Capacitors for General Purpose, 0805, 10uF, X5R, 15%, 10%, 16V", Capacitance=10uF, Case Code (Imperial)=0805, Case Code (Metric)=2012, Dielectric=X5R, Max Operating Temperature=85°C, Min Operating Temperature=-55°C, Package Quantity=1, Tolerance=10%, Voltage=16V, Case/Package=0805, Depth=1.25mm, Height=1.25mm, Lead Free="Lead Free", Length=2mm, Material=Ceramic, Mount="Surface Mount", Packaging="Tape and Reel", Radiation Hardening=No, REACH SVHC="No SVHC", Termination=SMD/SMT, Thickness=0.053inch, Voltage Rating=16V, Voltage Rating (DC)=16V, Width=1.25mm
C5 C8: library part CMP-05427-000047-1, "EEE-1AA101WR, CAP ALUM 100UF 20% 10V SMD", Capacitance=100uF, Case/Package=Radial, Max Operating Temperature=85°C, Min Operating Temperature=-40°C, Package Quantity=1, Ripple Current=50mA, Tolerance=20%, Voltage Rating=10V, Construction=Cylindrical, Contact Plating=Tin, Diameter=5mm, Height=5.4mm, Height - Seated (Max)=0.213inch, Lead Free="Lead Free", Length=5.5mm, Life (Hours)=1000Hour, Mount="Surface Mount", Packaging="Tape and Reel", Radiation Hardening=No, Ripple Current (AC)=50mA, RoHS Compliant=Yes, Series=S, Termination=SMD/SMT, Voltage Rating (DC)=10V
C6: library part CMP-2007-01395-1, "VJ0805Y102JXXPW1BC", Manufacturer=Vitramon, Part Number=VJ0805Y102JXXPW1BC
C9 C11 C15: library part CMP-2007-03324-1, "C0805C101KCGACTU", Manufacturer=Kemet, Part Number=C0805C101KCGACTU
C10 C14 C16: library part CMP-2007-03234-1, "C0805C105K3RACTU", Manufacturer=Kemet, Part Number=C0805C105K3RACTU
D1 D2: library part CMP-1054-00051-1, "SMMSD914T1G, Switching Diode, 2-Pin SOD-123, Pb-Free, Tape and Reel", Manufacturer="On Semiconductor", ComponentLink1Description="Manufacturer URL", ComponentLink1URL=http://www.onsemi.com/, ComponentLink2Description=Datasheet, ComponentLink2URL=http://www.onsemi.com/pub_link/Collateral/MMSD914T1-D.PDF, ComponentLink3Description="Package Specification", ComponentLink3URL=http://www.onsemi.com/pub_link/Collateral/425-04.PDF, Configuration=Single, DatasheetVersion="Rev. 11", IF Max (A)=0.2, Mounting Technology="Surface Mount", PackageDescription="2-Pin SOD, Body 1.6 x 2.69 mm", PackageReference=SOD-123-2-425-04, PackageVersion="Rev. G, 10/2009", Packing="Tape and Reel", PartNumber=SMMSD914T1G, RoHS=TRUE, trr Max (ns)=4
D3 D5: library part CMP-1426-00011-3, "LED Uni-Color Red 630nm 2-Pin Chip 0805(2012Metric) T/R", Case Code (Imperial)=0805, Case Code (Metric)=2012, Color=Red, Forward Current=100mA, Forward Voltage=2V, Max Junction Temperature (Tj)=95°C, Max Operating Temperature=85°C, Max Reverse Voltage (DC)=5V, Min Operating Temperature=-40°C, Power Dissipation=72mW, Test Current=20mA, Case/Package=0805, Dominant Wavelength=625nm, Height=700µm, Length=2mm, Lens Style="Clear, Rectangular", Luminous Intensity=150mcd, Mount="Surface Mount", Packaging="Tape and Reel", Peak Wavelength=630nm, REACH SVHC=Unknown, RoHS=Compliant, Viewing Angle=140°, Wavelength=625nm, Width=1.25mm
D4: library part CMP-1426-00008-7, "Led, Blue, 470 Nm, 3.2 V, 30 Ma, 145 Mcd Rohs Compliant: Yes", Case Code (Imperial)=0805, Case Code (Metric)=2012, Color=Blue, Forward Current=100mA, Forward Voltage=3.2V, Max Junction Temperature (Tj)=95°C, Max Operating Temperature=85°C, Max Reverse Voltage (DC)=5V, Min Operating Temperature=-40°C, Power Dissipation=105mW, Test Current=20mA, Case/Package=0805, Dominant Wavelength=470nm, Height=700µm, Lead Free="Lead Free", Length=2mm, Lens Style="Clear, Rectangular", Luminous Intensity=145mcd, Mount="Surface Mount", Packaging="Tape and Reel", Peak Wavelength=465nm, REACH SVHC=Unknown, Reverse Voltage=5V, RoHS=Compliant, Viewing Angle=140°, Wavelength=470nm, Width=1.25mm
D6: library part CMP-0303-00003-3, "DIODE SCHOTTKY 40V 1A SOD123", Average Rectified Current=1A, Capacitance=110pF, Case/Package=SOD-123-2, Forward Voltage=450mV, Max Forward Surge Current (Ifsm)=25A, Max Operating Temperature=125°C, Max Power Dissipation=450mW, Max Repetitive Reverse Voltage (Vrrm)=40V, Min Operating Temperature=-65°C, Package Quantity=3000, Peak Reverse Current=50uA, Contact Plating=Tin, Current Rating=1A, Element Configuration=Single, Forward Current=1A, Height=1.25mm, Lead Free="Lead Free", Length=2.85mm, Max Reverse Voltage (DC)=40V, Number of Pins=2, Output Current=1A, Packaging="Tape and Reel", Peak Non-Repetitive Surge Current=25A, Polarity=Standard, Radiation Hardening=No, REACH SVHC="No SVHC", Termination=SMD/SMT, Voltage Rating (DC)=40V, Weight=0.000353oz, Width=1.7mm
D7: library part CMP-2000-05191-1, "TVS Diode Array, 30 pF, 30 KV, -40 to 85 degC, 4-Pin SOT143, RoHS, Tape and Reel", Capacitance Value=30pF, Clamping Voltage=8V, Leakage Current=0.1uA, Manufacturer=Littelfuse, Operating Temp Range=-40Cto85C, Operating Temperature Classification=Industrial, Operating Temperature Max Deg. C=85C, Operating Temperature Min Deg. C=-40C, Package / Case=SOT-143, Reverse Stand-off Voltage=5.5(Min)V, Working Voltage=5.5V, Working Voltage (Max)=5.5V(Min), Clamping Voltage (Max)=8V, Configuration=Triple, Datasheet URL=https://datasheet.ciiva.com/15143/getdatasheetpartid-116020-15143550.pdf, Datasheet Version=Dec-13, Direction Type=Uni-Directional, Leakage Current (Max)=0.1uA, Manufacturer URL=http://www.littelfuse.com/, Mounting=SurfaceMount, Mounting Style=SurfaceMount, Number of Elements=3, Package Type=SOT-143, Packaging=TapeandReel, Pin Count=3+Tab, Polarity=Uni-Directional, Product Depth (mm)=1.4mm, Product Height (mm)=1.05mm, Product Length (mm)=3.04mm, Rad Hardened=No, Suppressor Type=TVS
FB1 FB3: library part CMP-0220-00029-2, Case Code (Imperial)=0805, Case Code (Metric)=2012, Case/Package=SMD/SMT, Current Rating=2A, DC Resistance (DCR)=50mΩ, Inductance=5.6H, Max Operating Temperature=125°C, Min Operating Temperature=-55°C, Test Frequency=100MHz, Tolerance=25%, Core Material=Ferrite, Depth=1.2mm, Height=900µm, Impedance=220Ω, Lead Free="Lead Free", Length=2mm, Material=Ferrite, Max Current Rating=2A, Max DC Current=2A, Mount="Surface Mount", NexarPartId=7861696, Number of Lines=1, Packaging=Digi-Reel®, REACH SVHC=Unknown, Resistance=50mΩ, RoHS=Compliant, Termination=SMD/SMT, Weight=10.999615mg, Width=1.2mm
FB2: library part CMP-0220-00015-3, Case Code (Imperial)=1206, Case Code (Metric)=3216, Current Rating=2A, DC Resistance (DCR)=100mΩ, Max Operating Temperature=125°C, Min Operating Temperature=-55°C, Test Frequency=100MHz, Tolerance=25%, Case/Package=1206, Core Material=Ferrite, Depth=1.6mm, Height=1.1mm, Impedance=600Ω, Lead Free="Lead Free", Length=3.2mm, Max Current Rating=2A, Max DC Current=2A, Mount="Surface Mount", NexarPartId=21041562, Number of Lines=1, Packaging="Cut Tape (CT)", REACH SVHC=Unknown, Resistance=100mΩ, RMS Current (Irms)=2A, RoHS=Compliant, Series Resistance=100mΩ, Termination=SMD/SMT, Weight=28.009329mg, Width=1.6mm
J1 J2: library part CMP-1502-02466-2, Color="Blue, Green", Current=10A, Max Operating Temperature=105°C, Min Operating Temperature=-40°C, Voltage=300V, Contact Material=Brass, Contact Plating="Brass, Tin", Current Rating=10A, Height=12.2mm, Housing Material=Nylon, Lead Pitch=3.5mm, Length=7.4mm, Mount="Through Hole", NexarPartId=18818289, Number of Contacts=3, Number of Levels=1, Number of Pins=3, Number of Positions Per Level=3, Packaging=Box, Pitch=3.5052mm, Plating="Brass, Steel", REACH SVHC=Unknown, RoHS=Compliant, Stripping Length=-6mm, Termination=Screw, Voltage Rating=300V, Width=10.9mm, Wire Gauge (Max)=24AWG, Wire Gauge (Min)=16AWG, Wire/Cable Gauge=24AWG
J3: library part CMP-1502-03249-5, Contact Resistance=30mΩ, Current Rating=1.8A, Insulation Resistance=1GΩ, Max Operating Temperature=85°C, Min Operating Temperature=-40°C, Operating Supply Voltage=30V, Connector Type=USB, Contact Material=Gold, Contact Plating=Gold, Features=Shielded, Gender=Receptacle, Height=2.82mm, Mount="Horizontal, Surface Mount", NexarPartId=52645114, Number of Contacts=5, Number of Pins=5, Orientation=Horizontal, Packaging="Tape and Reel", REACH SVHC=Unknown, RoHS=Compliant, Termination=SMD/SMT, USB Standard="USB 2.0", Voltage Rating=30V
K1 K2: "No Description Available", Mfr_Name="American Zettler", RefDes=RefDes, Type="Power Relays"
P1 P2: library part CMP-1502-01074-3, Color=Black, Contact Resistance=20mΩ, Current Rating=3A, Operating Supply Voltage=250V, Connector Type="Male Pin", Contact Material=Copper, Contact Mating Length=5.9944mm, Contact Plating=Gold, Gender=Male, Lead Pitch=2.54mm, Mount="Through Hole", NexarPartId=32855531, Number of Contacts=7, Number of Pins=7, Number of Positions=7, Number of Rows=1, Orientation=Vertical, Packaging=Bulk, Pitch=2.54mm, REACH SVHC=Unknown, RoHS=Compliant, Termination=Solder
P3 P5: library part CMP-1502-01062-3, Color=Black, Contact Resistance=20mΩ, Current Rating=3A, Max Operating Temperature=105°C, Min Operating Temperature=-40°C, Operating Supply Voltage=250V, Connector Type="Male Pin", Contact Material=Copper, Contact Mating Length=5.9944mm, Contact Plating=Gold, Gender=Male, Height=8.94mm, Lead Free="Lead Free", Lead Pitch=2.54mm, Mount="Through Hole", NexarPartId=32855521, Number of Contacts=3, Number of Pins=3, Number of Positions=3, Number of Rows=1, Orientation=Vertical, Packaging=Bulk, Pitch=2.54mm, REACH SVHC=Unknown, RoHS=Compliant, Termination=Solder, Voltage Rating=250V
P4: library part CMP-1712-00002-6, Color=Black, Contact Resistance=20mΩ, Current Rating=3A, Max Operating Temperature=125°C, Min Operating Temperature=-40°C, Operating Supply Voltage=250V, Connector Type="Male Pin", Contact Gender=Male, Contact Material=Copper, Contact Mating Length=5.9944mm, Contact Plating=Gold, Gender=Male, Height=8.94mm, Housing Material=PBT, Lead Free="Lead Free", Lead Pitch=2.54mm, Mount="Through Hole", NexarPartId=20081794, Number of Contacts=2, Number of Pins=2, Number of Positions=2, Number of Rows=1, Orientation=Vertical, Packaging=Bulk, Pitch=2.54mm, REACH SVHC="No SVHC", RoHS=Compliant, Termination="Through Hole", Voltage Rating=250V
P6: library part CMP-1502-01064-3, Color=Black, Contact Resistance=20mΩ, Current Rating=3A, Max Operating Temperature=105°C, Min Operating Temperature=-40°C, Operating Supply Voltage=250V, Connector Type="Male Pin", Contact Material=Copper, Contact Mating Length=5.9944mm, Contact Plating=Gold, Gender=Male, Height=8.89mm, Lead Free="Lead Free", Lead Pitch=2.54mm, Mount="Through Hole", NexarPartId=32855522, Number of Contacts=4, Number of Pins=4, Number of Positions=4, Number of Rows=1, Orientation=Vertical, Packaging=Bulk, Pitch=2.54mm, REACH SVHC=Unknown, RoHS=Compliant, Termination=Solder, Voltage Rating=250V
Q1 Q2 Q3 Q4: library part CMP-1048-00538-1, "General Purpose Transistor, NPN Silicon, 3-Pin SOT-23, Pb-Free, Tape and Reel", Manufacturer="On Semiconductor", ComponentLink1Description="Manufacturer URL", ComponentLink1URL=http://www.onsemi.com/, ComponentLink2Description=Datasheet, ComponentLink2URL=http://www.onsemi.cn/pub_link/Collateral/MMBT2222LT1-D.PDF, ComponentLink3Description="Package Specification", ComponentLink3URL=http://www.onsemi.cn/pub_link/Collateral/318-08.PDF, DatasheetVersion="Rev. 10", fT Min (MHz)=300, IC Continuous (A)=0.6, Mounting Technology="Surface Mount", PackageDescription="3-Pin Small Outline Transistor, Body 2.92 x 1.3 mm, Pitch 0.95 mm", PackageReference=SOT-23-3-318-08, PackageVersion="Rev. AP, 11/2009", Packing="Tape and Reel", PartNumber=MMBT2222ALT1G, Polarity=NPN, RoHS=TRUE
R1: library part CMP-2001-04436-1, "ERJ-6ENF1473V", Manufacturer=Panasonic, Part Number=ERJ-6ENF1473V
R2 R4: library part CMP-2001-04915-1, Manufacturer="Vishay Dale", Part Number=CRCW080510R0FKEA
R3 R7 R8 R9 R13 R15 R20 R22 R23 R24 R27: library part CMP-2001-04472-1, "CRCW080510K0FKEAHP", Manufacturer="Vishay Dale", Part Number=CRCW080510K0FKEAHP
R5 R6 R16 R17 R18: library part CMP-2100-03671-1, "RC0805FR-071KL Chip Resistor, 1 KOhm, +/- 1%, 125 mW, -55 to 155 degC, 0805 (2012 Metric), RoHS, Tape and Reel", Case Code (Imperial)=0805, Case Code (Metric)=2012, Manufacturer=Yageo, Max Operating Temperature=155degC, Max Power Dissipation=125mW, Min Operating Temperature=-55degC, Package Description="2-Pin Surface Mounted Device, Body 2 x 1.25 mm", Package Quantity=1, Resistance=1KOhm, Temperature Coefficient=100ppm/degreesC, Tolerance=1%, Voltage Rating=150V, Case/Package=0805, Composition=ThickFilm, Datasheet URL=http://www.yageo.com/NewPortal/yageodocoutput?fileName=/pdf/R-Chip/PYu-RC_Group_51_RoHS_L_5.pdf, Datasheet Version="Rev. 5, 10/2016", Depth=1.25mm, Height=0.024inch, Lead Free=LeadFree, Length=0.079inch, Manufacturer URL=http://www.yageo.com/, Military Standard=Not, Number of Pins=2, Number of Terminations=2, Package Reference=0805, Packaging=TapeandReel, Power Rating=125mW, REACH SVHC=Unknown, RoHSCompliant=true, Termination=SMD/SMT, Voltage Rating (DC)=150V, Width=0.049inch
R10 R11 R21: library part CMP-2001-01994-1, "RK73H2ATTD1003F", Manufacturer="KOA Speer", Part Number=RK73H2ATTD1003F
R12: library part CMP-2001-00574-1, "ERJ6ENF8203V", Manufacturer=Panasonic, Part Number=ERJ6ENF8203V
R14: library part CMP-2001-04901-1, "CRCW0805100RFKEA", Manufacturer="Vishay Dale", Part Number=CRCW0805100RFKEA
R19: library part CMP-00030-39740690-1, "TS53YL104MR10 Resistor Trimmer, Cermet, 100 kOhm, ± 20%, 250 mW, 1 Turn, Single Turn, Surface Mount", Max Operating Temperature=125°C, Max Power Dissipation=250mW, Min Operating Temperature=-55°C, Resistance=100kΩ, Temperature Coefficient=100ppm/°C, Tolerance=20%, Voltage Rating=158V, Voltage Rating (AC)=200V, Composition=Cermet, Depth=6.4mm, Height=2.6924mm, Lead Free="Lead Free", Length=5mm, Military Standard=Not, Mount="Surface Mount", NexarPartId=39740690, Number of Turns=1, Packaging="Cut Tape", Power Rating=250mW, Radiation Hardening=No, REACH SVHC=Unknown, RoHS=Compliant, Schedule B="8533400080, 8533400080", Taper=Linear, Termination="Gull Wing", Voltage Rating (DC)=200V, Width=5.0038mm
R25: library part CMP-2001-00049-1, "ERJ-6ENF2212V", Manufacturer=Panasonic, Part Number=ERJ-6ENF2212V
R26: library part CMP-1659-00011-4, "RC0805FR-0747KL, Chip Resistor, 47 KOhm, +/- 1%, 0.125 W, -55 to 155 degC, 0805 (2012 Metric), RoHS, Tape and Reel", Manufacturer=Yageo, Max Operating Temperature="155 degC", Min Operating Temperature="-55 degC", Package Quantity=200, Voltage Rating="150 V", ComponentLink1Description="Manufacturer URL", ComponentLink1URL=http://www.yageo.com/, ComponentLink2Description=Datasheet, ComponentLink2URL=http://www.yageo.com/documents/recent/PYu-RC_Group_51_RoHS_L_04.pdf, DatasheetVersion="Rev. 4, 02/2016", Height="0.5 mm", Length="2 mm", Mount="Surface Mount", Mounting Technology="Surface Mount", PackageDescription="2-Pin Surface Mounted Device, Body 2 x 1.25 mm", PackageReference=0805, Packaging="Tape and Reel", Pins=2, REACH SVHC="No SVHC", RoHSCompliant=true
R28: library part CMP-2100-03671-1, "RC0805FR-071KL, Chip Resistor, 1 KOhm, +/- 1%, 125 mW, -55 to 155 degC, 0805 (2012 Metric), RoHS, Tape and Reel", Case Code (Imperial)=0805, Case Code (Metric)=2012, Manufacturer=Yageo, Max Operating Temperature=155degC, Max Power Dissipation=125mW, Min Operating Temperature=-55degC, Package Description="2-Pin Surface Mounted Device, Body 2 x 1.25 mm", Package Quantity=1, Resistance=1KOhm, Temperature Coefficient=100ppm/degreesC, Tolerance=1%, Voltage Rating=150V, Case/Package=0805, Composition=ThickFilm, Datasheet URL=http://www.yageo.com/NewPortal/yageodocoutput?fileName=/pdf/R-Chip/PYu-RC_Group_51_RoHS_L_5.pdf, Datasheet Version="Rev. 5, 10/2016", Depth=1.25mm, Height=0.024inch, Lead Free=LeadFree, Length=0.079inch, Manufacturer URL=http://www.yageo.com/, Military Standard=Not, Number of Pins=2, Number of Terminations=2, Package Reference=0805, Packaging=TapeandReel, Power Rating=125mW, REACH SVHC=Unknown, RoHSCompliant=true, Termination=SMD/SMT, Voltage Rating (DC)=150V, Width=0.049inch
R29: library part CMP-1659-00013-4, "RC0805FR-0710KL, Chip Resistor, 10 KOhm, +/- 1%, 0.125 W, -55 to 155 degC, 0805 (2012 Metric), RoHS, Tape and Reel", Manufacturer=Yageo, Max Operating Temperature="155 degC", Min Operating Temperature="-55 degC", Package Quantity=5000, Voltage Rating="150 V", ComponentLink1Description="Manufacturer URL", ComponentLink1URL=http://www.yageo.com/, ComponentLink2Description=Datasheet, ComponentLink2URL=http://www.yageo.com/documents/recent/PYu-RC_Group_51_RoHS_L_04.pdf, DatasheetVersion="Rev. 4, 02/2016", Height="0.5 mm", Length="2 mm", Mount="Surface Mount", Mounting Technology="Surface Mount", PackageDescription="2-Pin Surface Mounted Device, Body 2 x 1.25 mm", PackageReference=0805, Packaging="Tape and Reel", Pins=2, REACH SVHC="No SVHC", RoHSCompliant=true
SW1 SW2: library part CMP-2000-07511-1, "FSMSM Push Button Switch, 50 mA, -35 to 85 degC, 2-Pin SMD, RoHS, Bulk", Case\/Package=SMD/SMT, Contact Current Rating=50mA, Contact Resistance=100mOhm, Manufacturer="TE Connectivity", Max Operating Temperature=85degC, Max Voltage Rating (DC)=12V, Min Operating Temperature=-35degC, Operating Force=180gf, Package Description="2-Pin Surface Mount Device, Body 6 x 3.5 mm, Pitch 9.19 mm", Package Quantity=1000, Package Reference=FSMSM, Voltage Rating (DC)=24V, Actuator Length=1.07mm, Actuator Material=Polyamide, Contact Material=Brass, Contact Plating=Silver, Current Rating=50mA, Datasheet URL=http://www.te.com/commerce/DocumentDelivery/DDEController?Action=showdoc&DocId=Customer+Drawing%7F1437566-3%7FC2%7Fpdf%7FEnglish%7FENG_CD_1437566-3_C2_1437566_3_1_c.dwg.pdf%7F1437566-3, Datasheet Version="Rev. C2, 08/2014", Electrical Life=20000Cycles, ELV=Compliant, Illumination Type=Illuminated, Lead Free=LeadFree, Manufacturer URL=http://www.te.com/, Mechanical Life=20000Cycles, Mount=SurfaceMount, Mounting Technology=SurfaceMount, Orientation=Straight, Packaging=LoosePiece, REACH SVHC=Unknown, RoHSCompliant=true, Switch Travel=0.25mm, Termination=GullWing, Throw Configuration=SPST
T1: "Current-type Voltage Transformer", Package=None, Availability="Not in stock", Check_prices=https://www.snapeda.com/parts/ZMPT101B/Qingxian+Zeming+Langxi+Electronic/view-part/?ref=eda, MF="Qingxian Zeming Langxi Electronic", MP=ZMPT101B, Price=None, SnapEDA_Link=https://www.snapeda.com/parts/ZMPT101B/Qingxian+Zeming+Langxi+Electronic/view-part/?ref=snap
U1 U3: library part CMP-06324-000044-1, "IC REG LINEAR 3.3V 500MA SOT223", Case/Package=SOT-223, Dropout Voltage=350mV, Max Input Voltage=16V, Max Operating Temperature=125°C, Min Input Voltage=2.5V, Min Operating Temperature=-40°C, Nominal Output Voltage=3.3V, Output Current=500mA, Mount="Surface Mount", Number of Pins=3, Number of Regulators=1, Output Type=Fixed, Output Voltage=3.3V, Packaging=Rail/Tube, REACH SVHC="No SVHC"
U2: library part CMP-82923-000001-3, "SENSOR CURRENT HALL 20A AC/DC", Case/Package=SOIC, Current Sensing=20A, Frequency=120kHz, Max Operating Temperature=150°C, Max Supply Current=14mA, Min Operating Temperature=-40°C, Quiescent Current=10mA, Accuracy=0.8%, Bandwidth=120kHz, Linearity=1.5%, Mount="Surface Mount", Number of Channels=1, Number of Pins=8, Packaging="Tape and Reel", Polarity=Bidirectional, Response Time=4us, RoHS Compliant=Yes, Sensitivity=66mV/A
U4: "Bluetooth, WiFi 802.11b/g/n, Bluetooth v5.0 Transceiver Module 2.4GHz Antenna Not Included, U.FL Surface Mount", Package=None, Availability=Unavailable, Check_prices=https://www.snapeda.com/parts/ESP32-S3-WROOM-1U-N16R8/Espressif+Systems/view-part/?ref=eda, MF="Espressif Systems", MP=ESP32-S3-WROOM-1U-N16R8, Price=None, SnapEDA_Link=https://www.snapeda.com/parts/ESP32-S3-WROOM-1U-N16R8/Espressif+Systems/view-part/?ref=snap
U5: library part CMP-1310-00289-1, "Single Supply Dual Operational Amplifier, 3 to 32 V, 0 to 70 degC, 8-Pin SOIC, Pb-Free, Tape and Reel", Manufacturer="On Semiconductor", ComponentLink1Description="Manufacturer URL", ComponentLink1URL=http://www.onsemi.com/, ComponentLink2Description=Datasheet, ComponentLink2URL=http://www.onsemi.cn/pub_link/Collateral/LM358-D.PDF, ComponentLink3Description="Package Specification", ComponentLink3URL=http://www.onsemi.com/pub_link/Collateral/751-07.PDF, DatasheetVersion="Rev. 27", Mounting Technology="Surface Mount", PackageDescription="8-Pin Small Outline Integrated Circuit, Body 4.9 x 3.9 mm, Pitch 1.27 mm", PackageReference=SOIC-8-751-07, PackageVersion="Rev. AK, 02/2011", Packing="Tape and Reel", PartNumber=LM358ADR2G, RoHS=TRUE, VCC Max (V)=32, VCC Min (V)=3
U6: library part CMP-0511-00012-1, "Single-Chip USB to UART Bridge, 1024 Bytes EEPROM, -40 to 85 degC, 28-pin QFN, Tube", Manufacturer="Silicon Labs", Code_IPC=J-STD-020C, Code_JEDEC=MO-220, ComponentLink1Description="Manufacturer URL", ComponentLink1URL=http://www.silabs.com/, ComponentLink2Description=Datasheet, ComponentLink2URL=http://www.silabs.com/Support%20Documents/TechnicalDocs/CP2102-9.pdf, ComponentLink3Description="Package Specification", ComponentLink3URL=http://www.silabs.com/Support%20Documents/TechnicalDocs/C8051T61x.pdf, DatasheetVersion="Rev. 1.5", EEPROM="1024 Bytes", Internal Oscillator=TRUE, Mounting Technology="Surface Mount", PackageDescription="28-Pin Quad-Flat No-Leads Package, Body 5 x 5 mm, Pitch 0.5 mm", PackageReference=QFN-28, PartNumber=CP2102-GM, Sub-Family="USB Bridges"

## Free pads (board coordinates)
  round 60 hole 118.11 unplated: ""(122.15,3504.69) ""(124.45,130.06) ""(3505.48,3501.97) ""(3509.33,124.29)

## Via types
v1: diameter 31.5, hole 19.68, Top Layer to Bottom Layer, 28 vias
v2: diameter 50, hole 28, Top Layer to Bottom Layer, 21 vias
v3: diameter 19.68, hole 7.87, Top Layer to Bottom Layer, 9 vias

## Nets (pads, with @x,y where several pads share a name; then routed paths per layer and width w, separated by ;. In a path a pad name is that pad's centre, name@x,y a point inside that pad or via, vN(x,y) a via of type N, cw(c..) or ccw(c..) an arc to the next point about the centre after c; other vN are vias at no path point)
+3V3A: C5.2 C12.2 C19.1 C21.2 R9.1 R28.2 U1.3 U4.2 U6.6 U6.7 | length 2490.6
  Top Layer w10: C5.2@766.61,1020.72 766.61,1045.68 C5.2@780.45,1059.52 ; R9.1@1382.77,1322.97 R9.1@1388.68,1322.97
  Top Layer w15.75: 1331.73,1383.37 1342.2,1372.9 1343.24,1362.81 1368.99,1336.75 R9.1@1380.69,1321.82
  Top Layer w19.68: v2@866.2,2043.84 1144.94,2043.84 1172,2016.78 v2@1181.56,2016.78 ; U4.2@1335.74,1533.47 1338.92,1536.65 v2(1338.92,1612.2)
  Top Layer w23.62: U4.2@1335.74,1515.38 U4.2@1335.74,1533.47
  Top Layer w27.56: C12.2@1290.3,1407.04 1319.82,1436.57 1319.82,1475.16 1335.74,1491.08 U4.2@1335.74,1515.38
  Top Layer w31.5: C5.2@780.45,1059.52 867.01,1059.52 1206.45,1398.96 C12.2@1319.14,1398.96
  Top Layer w39.37: U1.3@718.32,878.66 718.32,972.42 C5.2@766.61,1020.72
  Bottom Layer w10: R28.2@562.02,2034.13 562.55,2033.6 C21.2@665.58,2033.6 670.5,2033.6 687.16,2016.95 687.16,2012.03 721.55,1977.63 U6.7@721.55,1883.69 U6.6@701.87,1883.69
  Bottom Layer w19.68: C19.1@771.78,2031.51 774.13,2033.86 850.9,2033.86 860.88,2043.84 v2@866.2,2043.84 ; v2@1181.56,2016.78 1335.74,1862.6 v2@1335.74,1612.2
  Bottom Layer w23.62: C21.2@670.5,2033.6 C19.1@769.44,2033.6
  other v2: 1180.88,2016.1 863.54,2043.84